# EAGLE board PCBV2 v51 (EAGLE 9.7.0)
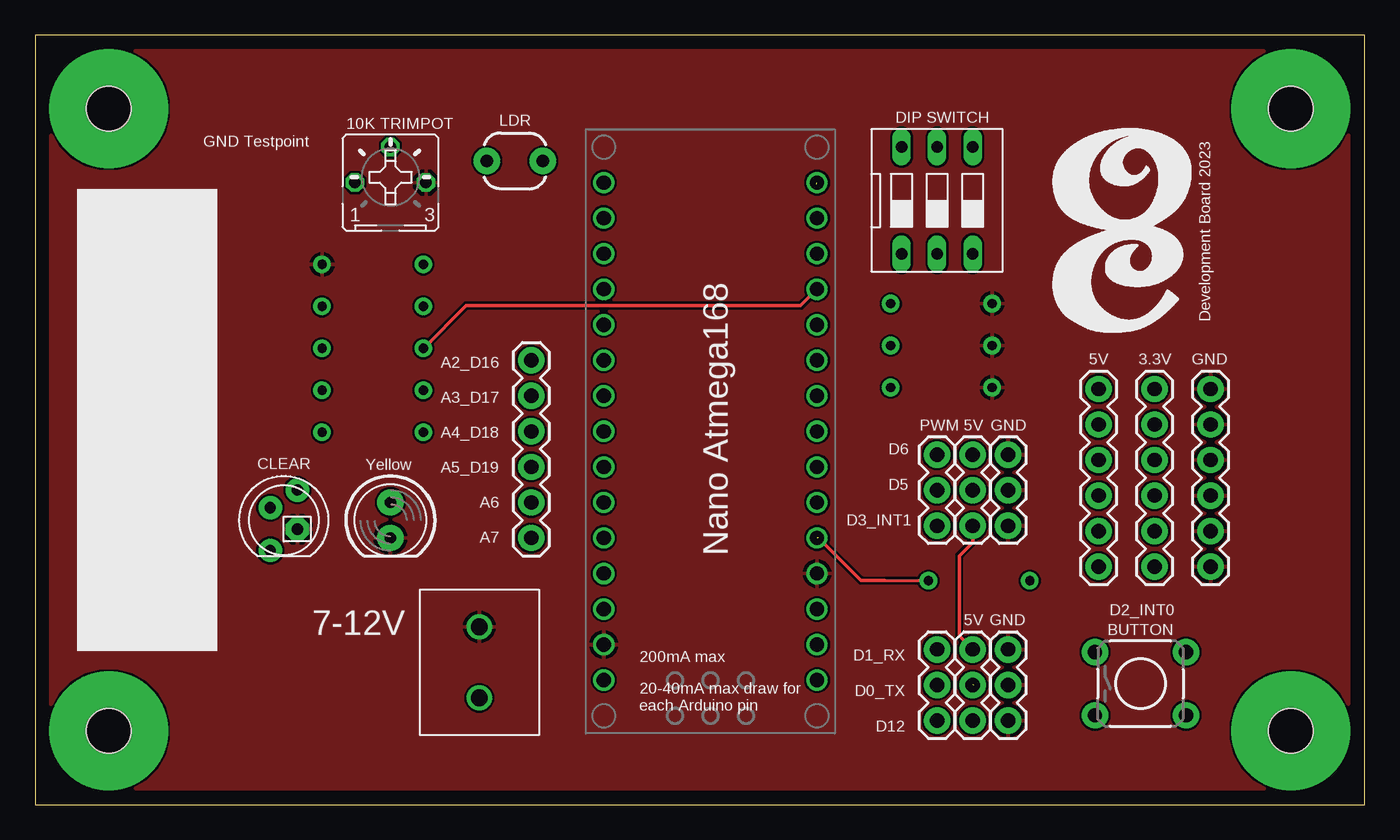
[diagram p0: board, top side]
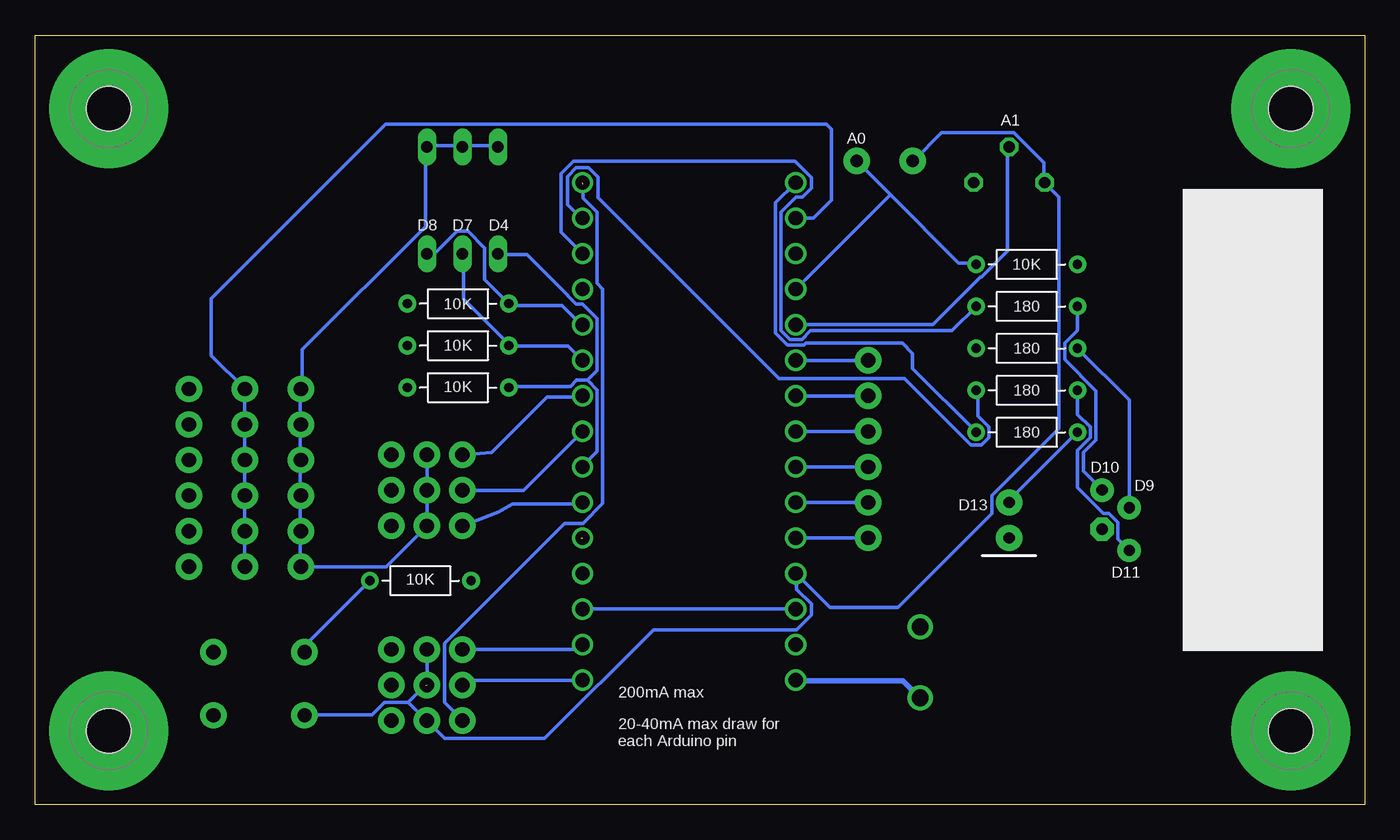
[diagram p1: board, bottom side, seen from below]

Size 95 x 55 mm. Coordinates in mm from the lower left corner, seen from the top.
Outline: 0,0 95,0 95,55 0,55 0,0
Copper layers (1*16): Top / Bottom
Stack-up Default Layer Stack: Top User Defined 0.035mm / Dielectric-1 User Defined 1.5mm / Bottom User Defined 0.035mm
Design rules "default": minimum track width 6mil, minimum drill 0.35mm, track to track 6mil, track to pad 6mil, pad to pad 6mil, via to via 6mil, smd to smd 6mil, copper to edge 40mil, drill to drill 6mil, minimum pad ring 10mil, minimum via ring 8mil, stop-mask expansion 4mil, vias tented up to drill 0mil, thermal gap 10mil

## Footprints (pad centres in the part's own frame; a part is rotated, then mirrored left to right if it is on the bottom)
LED5MMRGB = drill 0.8 pad 1.676: 1 -2.159,0.968; 3 0.889,0.968; 4 2.159,-0.968 | drill 0.8 pad 1.676 octagon: 2 -0.635,-0.968
LED_5MM = drill 0.813 pad 1.88: A -1.27,0; K 1.27,0
1X03 = drill 1.016 pad 1.88: 1 0,0; 2 2.54,0; 3 5.08,0
NANO = drill 1.016: 1 -7.62,17.78; 2 -7.62,15.24; 3 -7.62,12.7; 4 -7.62,10.16; 5 -7.62,7.62; 6 -7.62,5.08; 7 -7.62,2.54; 8 -7.62,0; 9 -7.62,-2.54; 10 -7.62,-5.08; 11 -7.62,-7.62; 12 -7.62,-10.16; 13 -7.62,-12.7; 14 -7.62,-15.24; 15 -7.62,-17.78; 16 7.62,-17.78; 17 7.62,-15.24; 18 7.62,-12.7; 19 7.62,-10.16; 20 7.62,-7.62; 21 7.62,-5.08; 22 7.62,-2.54; 23 7.62,0; 24 7.62,2.54; 25 7.62,5.08; 26 7.62,7.62; 27 7.62,10.16; 28 7.62,12.7; 29 7.62,15.24; 30 7.62,17.78
1X06 = drill 1.016 pad 1.88: 1 0,0; 2 2.54,0; 3 5.08,0; 4 7.62,0; 5 10.16,0; 6 12.7,0
STANDOFF_HEX_FEMALE_550X1000_M3X0.5_MTGP850H320 = drill 3.2 pad 8.5: 1 0,0 | hole 3.2: 0,0
PHOTOCELL-KIT = drill 0.9 pad 1.88: 1 -2,0; 2 2,0
RESAD724W46L381D178B = drill 0.66 pad 1.26: 1 -3.62,0; 2 3.62,0
B25P = drill 0.813 octagon: A -2.54,0; E 2.54,0; S 0,2.54
TACTILE_SWITCH_PTH_6.0MM_KIT = drill 1.016 pad 1.88: 1 -3.251,2.261; 2 3.251,2.261; 3 -3.251,-2.261; 4 3.251,-2.261
DS-03 = drill 0.813 long: 1 -2.54,-3.81; 2 0,-3.81; 3 2.54,-3.81; 4 2.54,3.81; 5 0,3.81; 6 -2.54,3.81
TERMBLK_508-2N = drill 1.2: 1 0,0; 2 5.08,0

## Placement (x,y rotation side)
CLEAR  RGBLED_CA-5MM  [LED5MMRGB]  17.78,20.32 90 top
D2  Yellow  [LED_5MM]  25.4,20.32 270 top
J1  [1X03]  64.46,6 90 top
J2  5V  [1X03]  67,6 90 top
J3  NANO_FOOTPRINT  [NANO]  48.26,26.67 180 top
J4  5V  [1X03]  67,25 270 top
J7  [1X03]  64.46,25 270 top
J8  GND  [1X03]  69.54,25 270 top
J10  GND  [1X06]  84,17 90 top
J11  GND  [1X03]  69.54,6 90 top
J12  [1X06]  35.46,19.05 90 top
J13  5V  [1X06]  76,17 90 top
J14  3.3V  [1X06]  80,17 90 top
MP1  STANDOFF_F/F_M3_10MM  [STANDOFF_HEX_FEMALE_550X1000_M3X0.5_MTGP850H320]  5.27,5.27 0 bottom
MP2  STANDOFF_F/F_M3_10MM  [STANDOFF_HEX_FEMALE_550X1000_M3X0.5_MTGP850H320]  89.73,49.73 0 bottom
MP3  STANDOFF_F/F_M3_10MM  [STANDOFF_HEX_FEMALE_550X1000_M3X0.5_MTGP850H320]  5.27,49.73 0 bottom
MP4  STANDOFF_F/F_M3_10MM  [STANDOFF_HEX_FEMALE_550X1000_M3X0.5_MTGP850H320]  89.73,5.27 0 bottom
R1  LDR  [PHOTOCELL-KIT]  34.29,46 0 top
R3  180  [RESAD724W46L381D178B]  24.13,26.6 180 bottom
R4  10K TRIMPOT  [B25P]  25.4,44.45 0 top
R5  10K  [RESAD724W46L381D178B]  67.46,16 0 bottom
R6  180  [RESAD724W46L381D178B]  24.13,32.6 180 bottom
R7  180  [RESAD724W46L381D178B]  24.13,35.6 180 bottom
R8  180  [RESAD724W46L381D178B]  24.13,29.6 180 bottom
R9  10K  [RESAD724W46L381D178B]  24.13,38.6 180 bottom
R10  10K  [RESAD724W46L381D178B]  64.77,35.8 0 bottom
R11  10K  [RESAD724W46L381D178B]  64.77,32.8 0 bottom
R12  10K  [RESAD724W46L381D178B]  64.77,29.8 0 bottom
S2  BUTTON  [TACTILE_SWITCH_PTH_6.0MM_KIT]  78.99,8.64 0 top
S3  DIP SWITCH  [DS-03]  64.46,43.18 0 top
U$1  2828XX-2282837-2  [TERMBLK_508-2N]  31.75,7.62 90 top

## Library data of the parts
CLEAR = adafruit
D2 = SparkFun-LED
J1 J2 J4 J7 J8 J11 = SparkFun-Connectors
J3 = SparkFun-Boards
J10 J12-J14 = SparkFun-Connectors; PROD_ID: CONN-08437
MP1-MP4 = PCB-Fasteners_Hardware; CATEGORY: Standoff/Spacer; SUB-CATEGORY: Female-Female
R1 = SparkFun-Sensors; PROD_ID: COMP-09129; SF_ID: SEN-09088
R3 R5-R12 = Resistor; CATEGORY: Resistor; SUB-CATEGORY: Fixed
R4 = pot
S2 = SparkFun-Switches; PROD_ID: SWCH-08441; SF_SKU: COM-00097
S3 = Switch; CATEGORY: SWITCH; TYPE: SPST
U$1 = Connector; CATEGORY: Connector; DESCRIPTION: 2 Position Wire to Board Terminal Block Horizontal with Board 5.08 mm Through Hole; MANUFACTURER: TE Connectivity; MPN: 282837-2; OPERATING_TEMPERATURE: -40°C to +105°C; PART_STATUS: ACTIVE; ROHS_COMPLIANCE: RoHS Compliant; SERIES: 282837; SUBCATEGORY: Terminal Block; TYPE: Side Wire Entry

## Nets
+3.3V: J3.17 J14.1 J14.2 J14.3 J14.4 J14.5 J14.6
+5V: J2.1 J2.2 J2.3 J3.27 J4.1 J4.2 J4.3 J13.1 J13.2 J13.3 J13.4 J13.5 J13.6 R1.1 R4.A S2.3 S3.4 S3.5 S3.6
+9V: J3.30 U$1.1
A0: J3.19 R1.2 R9.2
A1: J3.20 R4.S
A2: J3.21 J12.6
A3: J3.22 J12.5
A4: J3.23 J12.4
A5: J3.24 J12.3
A6: J3.25 J12.2
A7: J3.26 J12.1
D2: J3.5 R5.2
D3: J3.6 J7.3
D4: J3.7 R12.2 S3.1
D5: J3.8 J7.2
D6: J3.9 J7.1
D7: J3.10 R11.2 S3.2
D8: J3.11 R10.2 S3.3
D9: J3.12 R6.2
D10: J3.13 R7.2
D11: J3.14 R8.2
D12: J1.1 J3.15
D13: J3.16 R3.2
GND: CLEAR.2 D2.K J3.4 J3.29 J8.1 J8.2 J8.3 J10.1 J10.2 J10.3 J10.4 J10.5 J10.6 J11.1 J11.2 J11.3 R4.E R9.1 R10.1 R11.1 R12.1 U$1.2
N$1: D2.A R3.1
N$2: CLEAR.4 R7.1
N$4: R5.1 S2.1
N$7: CLEAR.3 R6.1
N$8: CLEAR.1 R8.1
REF: J3.18
RST: J3.3 J3.28
RX1: J1.3 J3.2
TX1: J1.2 J3.1

## Tracks (layer width: path | path; a pad name or v marks a point on that pad's centre or on a via)
+3.3V
  Bottom 0.254: J14.1 80.01,17.07 80.01,19.51 J14.2 80.01,19.66 80.01,21.95 J14.3 80.01,22.1 80.01,24.54 J14.4 80.01,24.69 80.01,27.13 J14.5 80.01,27.28 80.01,29.57 J14.6 82.4,32.1 82.4,36.17 69.95,48.62 38.46,48.62 38.1,48.26 38.1,43.18 39.37,41.91 J3.17
+5V  (1 unrouted)
  Top 0.254: J4.3 67,18.74 66.04,17.78 66.04,12.04 J2.3
  Bottom 0.254: 76.05,21.18 76.05,19.66 J13.2 76.05,19.51 76.05,17.07 J13.1 69.92,17 J4.3 J4.2 J4.1 | 76.05,21.18 76.05,21.95 J13.3 | S3.6 61.92,47.09 64.36,47.09 S3.5 64.52,47.09 66.95,47.09 S3.4 67.11,46.94 67.11,41.3 75.89,32.51 75.89,29.72 J13.6 76.05,29.57 76.05,27.28 J13.5 76.05,27.13 76.05,24.69 J13.4 76.05,24.54 76.05,22.1 J13.3 | 76.05,21.18 J13.3 | 68.33,7.32 70,7.32 70.92,6.4 75.64,6.4 S2.3 | 68.33,7.32 67.11,8.53 | R1.1 32.21,46.02 30.23,48.01 25.04,48.01 22.91,45.87 22.91,44.5 R4.A 21.83,43.42 21.83,26.89 26.62,22.09 26.62,20.79 33.34,14.07 38.2,14.07 J3.27 40.59,16.46 40.59,15.39 39.52,14.33 39.52,13.56 40.59,12.5 50.8,12.5 58.57,4.72 65.73,4.72 66.95,5.94 J2.1 67.11,6.1 68.33,7.32 | J2.3 J2.2
+9V
  Bottom 0.254: 40.59,8.84 J3.30
  Bottom 0.406: 40.59,8.84 32.97,8.84 U$1.1
A0
  Bottom 0.254: 33.88,43.59 36.17,45.87 R1.2 | 33.88,43.59 29.01,38.71 27.79,38.71 R9.2 | 33.88,43.59 J3.19
A1
  Bottom 0.254: J3.20 30.84,34.29 27.43,37.69 27.37,37.69 25.5,39.56 25.5,46.94 R4.S
A2
  Bottom 0.254: J12.6 J3.21
A3
  Bottom 0.254: J12.5 J3.22
A4
  Bottom 0.254: J12.4 J3.23
A5
  Bottom 0.254: J12.3 J3.24
A6
  Bottom 0.254: J12.2 J3.25
A7
  Bottom 0.254: J12.1 J3.26
D2  (1 unrouted)
  Top 0.254: 55.98,19.05 59.03,16 60.71,16 R5.2
D3
  Bottom 0.152: 55.98,21.49 J3.6
  Bottom 0.254: 55.98,21.49 60.86,21.49 61.88,20.9 J7.3
D4
  Bottom 0.254: 55.52,30.33 56.29,30.33 56.74,29.87 61.01,29.87 R12.2 | S3.1 61.77,39.32 59.84,39.32 56.95,36.42 56.95,36.39 56.32,35.76 55.88,35.76 54.84,34.72 54.84,31.01 55.52,30.33 | J3.7 55.88,24.18 54.84,25.22 54.84,29.64 55.52,30.33
D5
  Bottom 0.254: J7.2 60.09,22.46 J3.8
D6
  Bottom 0.254: J3.9 55.98,29.11 58.42,29.11 62.38,25.15 J7.1
D7
  Bottom 0.254: J3.10 56.9,32.77 61.01,32.77 R11.2 61.16,32.92 64.36,36.12 64.36,39.32 S3.2
D8
  Bottom 0.254: J3.11 55.98,34.29 57.35,35.66 61.01,35.66 R10.2 61.16,35.81 62.86,37.51 62.86,39.76 64.07,40.97 64.85,40.97 66.35,39.47 66.95,39.47 S3.3
D9
  Top 0.254: 54.3,35.66 53.34,35.66 | 53.34,35.66 31.45,35.66 30.81,35.66 R6.2 | J3.12 54.71,35.66 53.34,35.66
D10
  Bottom 0.254: J3.13 57.4,40.89 57.4,45.08 56.51,45.97 40.69,45.97 40.59,45.87 39.52,44.81 39.52,44.04 40.16,43.41 40.61,43.41 41.68,42.34 41.68,33.86 41.07,33.25 40.21,33.25 39.57,33.88 29.47,33.88 R7.2
D11
  Bottom 0.254: R8.2 27.64,29.57 27.64,27.77 26.84,26.98 26.84,26.22 27.37,25.69 28.13,25.69 32.87,30.43 41.82,30.43 54.76,43.37 54.76,44.84 55.44,45.52 56.32,45.52 56.95,44.89 56.95,42.88 55.98,41.91 J3.14
D12  (1 unrouted)
  Bottom 0.254: J1.1 64.52,6.1 65.73,7.32 65.73,11.53 57.17,20.09 55.85,20.09 54.43,21.51 54.43,36.85 54.84,37.26 54.84,42.34 55.83,43.33 55.83,44.35
D13
  Bottom 0.152: R3.2 27.75,26.63
  Bottom 0.254: 27.75,26.63 32.29,31.17 32.29,32.23 33.03,32.97 39.91,32.97 40.04,32.84 41.24,32.84 42.09,33.69 42.09,43 J3.16
GND
  pour Top: 95,0 0,0 0,55 95,55
N$1
  Bottom 0.152: 20.62,26.52 R3.1 | 25.5,21.64 D2.A
  Bottom 0.254: 20.62,26.52 25.5,21.64
N$2
  Bottom 0.254: R7.1 20.51,33.89 21.42,32.98 21.42,31.8 19.19,29.57 19.19,26.05 20.1,25.15 20.1,23.83 CLEAR.4
N$4
  Bottom 0.254: R5.1 75.74,11.34 S2.1
N$7
  Bottom 0.254: CLEAR.3 16.81,28.9 R6.1
N$8
  Bottom 0.254: CLEAR.1 17.63,18.98 17.63,20.15 18.29,20.8 18.65,20.8 20.51,22.66 20.51,25.31 19.6,26.22 19.6,26.98 20.51,27.89 R8.1
RST
  Bottom 0.254: J3.28 J3.3
RX1
  Bottom 0.254: J3.2 56.23,11.08 J1.3
TX1
  Bottom 0.254: J3.1 64.11,8.89 J1.2

## Text on the board
tPlace: D2_INT0
tNames: GND Testpoint | Development Board 2023 | Nano Atmega168 | 7-12V | 200mA max | 20-40mA max draw for / each Arduino pin
bNames: 200mA max | 20-40mA max draw for / each Arduino pin
200bmp: C:/Users/David/Desktop/logo.bmp